# EAGLE board 14113-nrf52840-breakout-mdbt50q-Panel (EAGLE 9.1.0), part 1 of 4
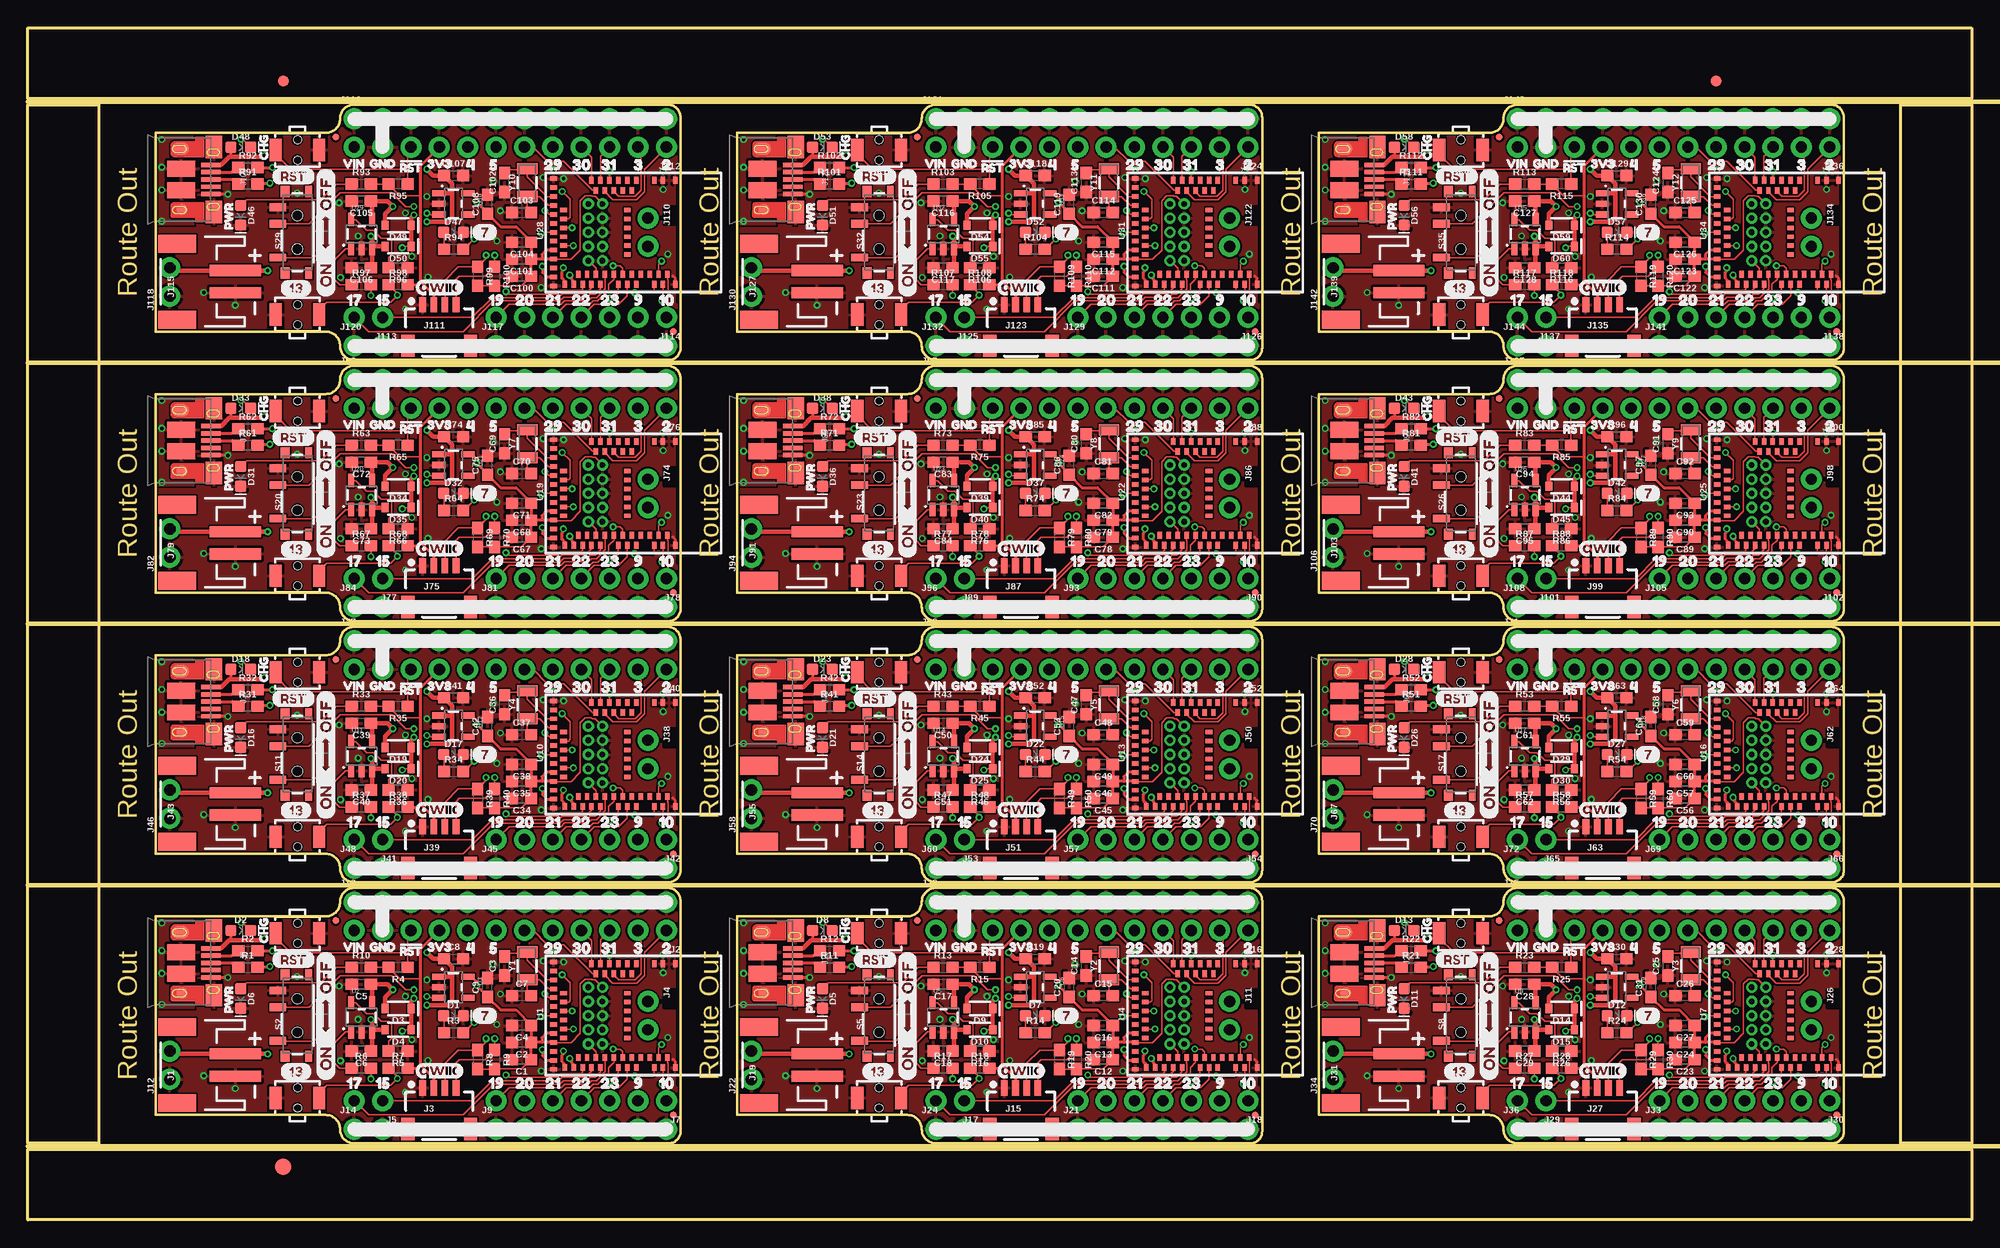
[diagram p0: board, top side]
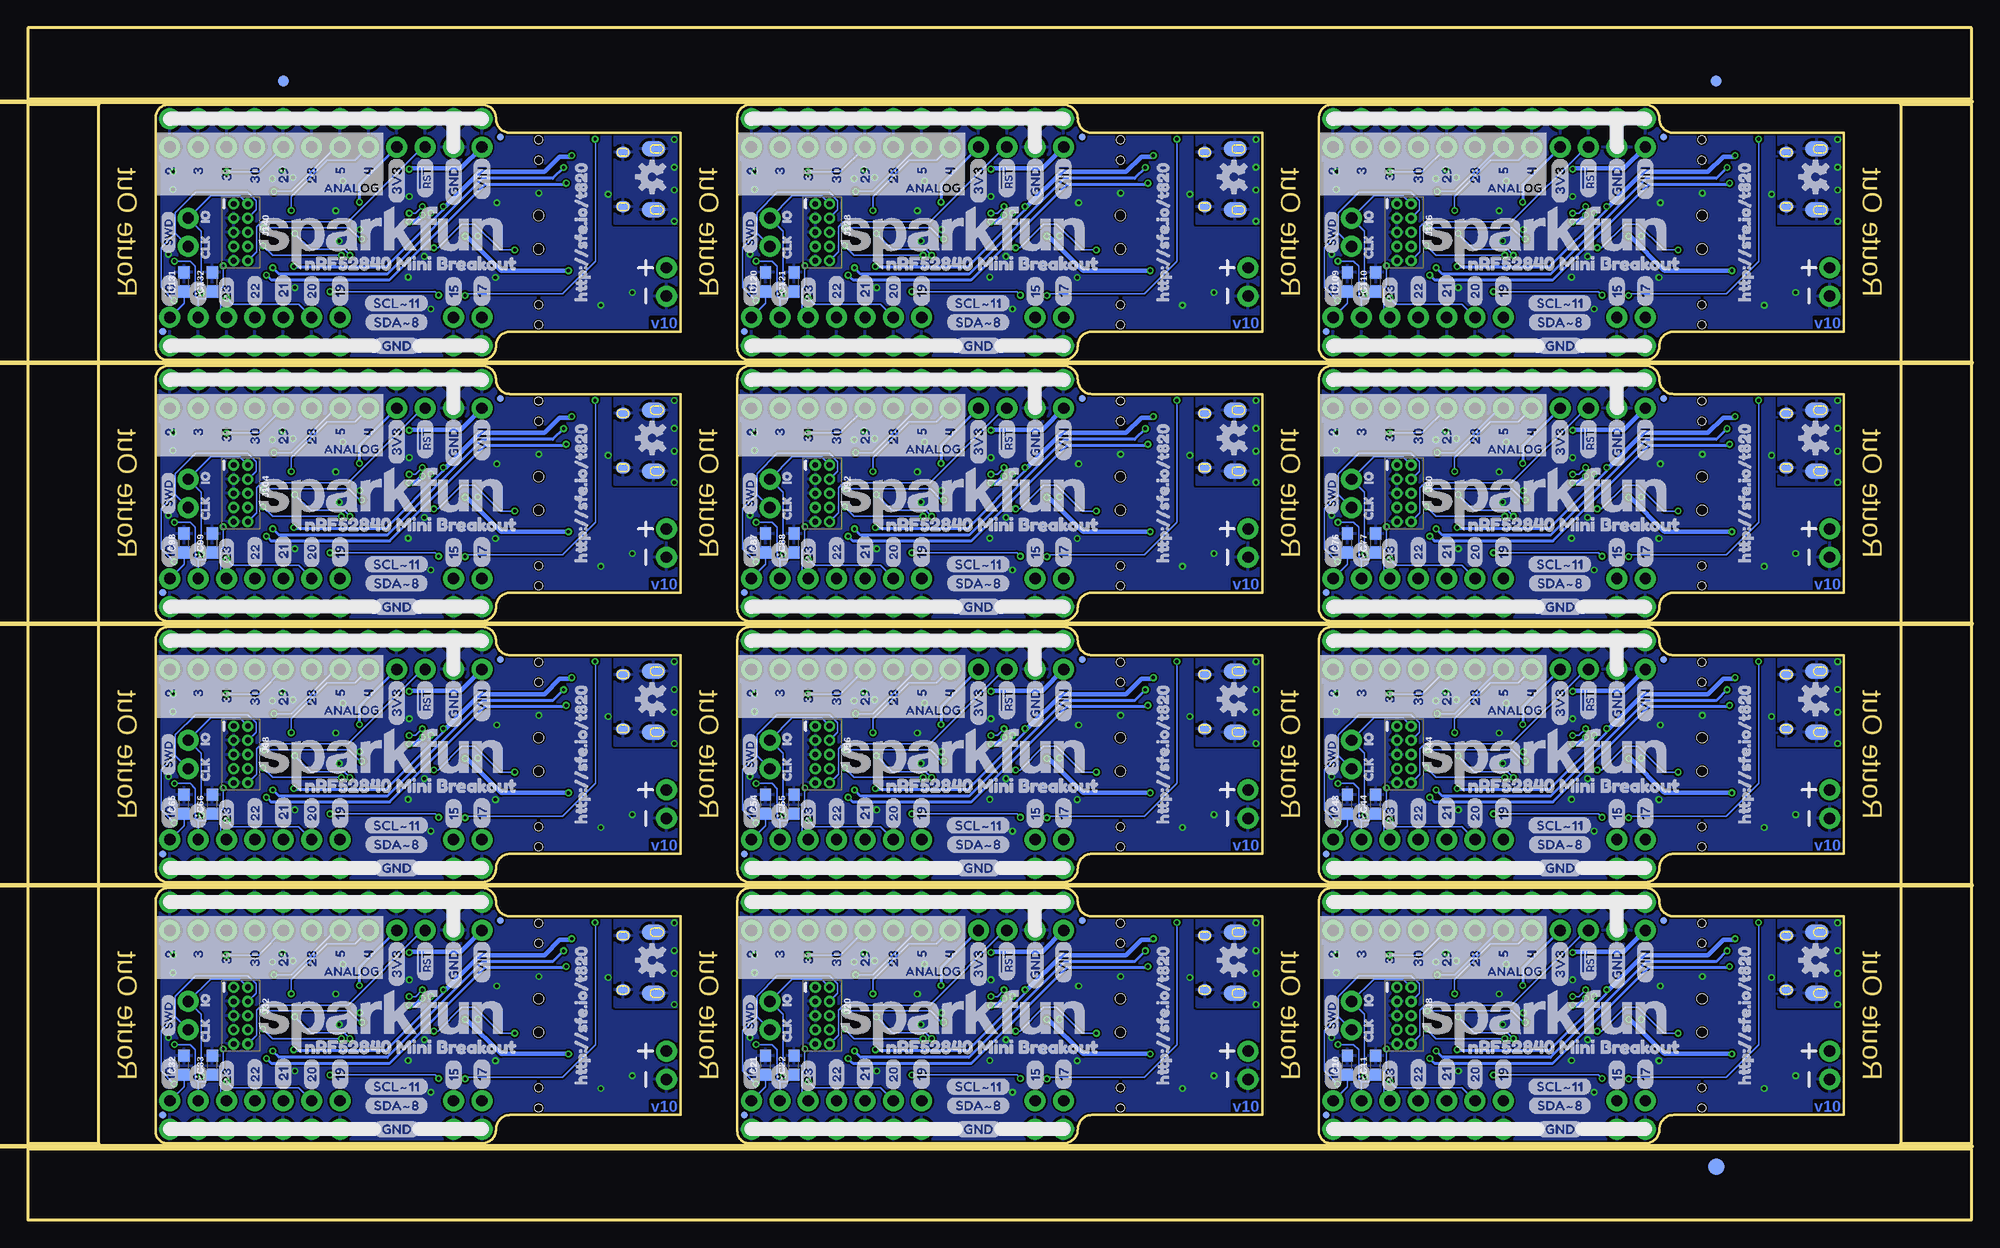
[diagram p1: board, bottom side, seen from below]

Size 173.99 x 106.68 mm. Coordinates in mm from the lower left corner, seen from the top.
Outline: 11.43,9.4 26.67,9.4 arc-90 27.94,8.13 arc90 29.21,6.86 57.34,6.86 arc90 58.42,7.93 58.42,28.55 arc90 57.26,29.72 29.21,29.72 arc90 27.94,28.45 arc-90 26.67,27.18 11.43,27.18 11.43,9.4
Outline: 63.5,9.4 78.74,9.4 arc-90 80.01,8.13 arc90 81.28,6.86 109.41,6.86 arc90 110.49,7.93 110.49,28.55 arc90 109.33,29.72 81.28,29.72 arc90 80.01,28.45 arc-90 78.74,27.18 63.5,27.18 63.5,9.4
Outline: 115.57,9.4 130.81,9.4 arc-90 132.08,8.13 arc90 133.35,6.86 161.49,6.86 arc90 162.56,7.93 162.56,28.55 arc90 161.4,29.72 133.35,29.72 arc90 132.08,28.45 arc-90 130.81,27.18 115.57,27.18 115.57,9.4
Outline: 11.43,32.77 26.67,32.77 arc-90 27.94,31.5 arc90 29.21,30.23 57.34,30.23 arc90 58.42,31.3 58.42,51.92 arc90 57.26,53.09 29.21,53.09 arc90 27.94,51.82 arc-90 26.67,50.55 11.43,50.55 11.43,32.77
Outline: 63.5,32.77 78.74,32.77 arc-90 80.01,31.5 arc90 81.28,30.23 109.41,30.23 arc90 110.49,31.3 110.49,51.92 arc90 109.33,53.09 81.28,53.09 arc90 80.01,51.82 arc-90 78.74,50.55 63.5,50.55 63.5,32.77
Outline: 115.57,32.77 130.81,32.77 arc-90 132.08,31.5 arc90 133.35,30.23 161.49,30.23 arc90 162.56,31.3 162.56,51.92 arc90 161.4,53.09 133.35,53.09 arc90 132.08,51.82 arc-90 130.81,50.55 115.57,50.55 115.57,32.77
Outline: 11.43,56.13 26.67,56.13 arc-90 27.94,54.86 arc90 29.21,53.59 57.34,53.59 arc90 58.42,54.67 58.42,75.29 arc90 57.26,76.45 29.21,76.45 arc90 27.94,75.18 arc-90 26.67,73.91 11.43,73.91 11.43,56.13
Outline: 63.5,56.13 78.74,56.13 arc-90 80.01,54.86 arc90 81.28,53.59 109.41,53.59 arc90 110.49,54.67 110.49,75.29 arc90 109.33,76.45 81.28,76.45 arc90 80.01,75.18 arc-90 78.74,73.91 63.5,73.91 63.5,56.13
Outline: 115.57,56.13 130.81,56.13 arc-90 132.08,54.86 arc90 133.35,53.59 161.49,53.59 arc90 162.56,54.67 162.56,75.29 arc90 161.4,76.45 133.35,76.45 arc90 132.08,75.18 arc-90 130.81,73.91 115.57,73.91 115.57,56.13
Outline: 11.43,79.5 26.67,79.5 arc-90 27.94,78.23 arc90 29.21,76.96 57.34,76.96 arc90 58.42,78.04 58.42,98.66 arc90 57.26,99.82 29.21,99.82 arc90 27.94,98.55 arc-90 26.67,97.28 11.43,97.28 11.43,79.5
Outline: 63.5,79.5 78.74,79.5 arc-90 80.01,78.23 arc90 81.28,76.96 109.41,76.96 arc90 110.49,78.04 110.49,98.66 arc90 109.33,99.82 81.28,99.82 arc90 80.01,98.55 arc-90 78.74,97.28 63.5,97.28 63.5,79.5
Outline: 115.57,79.5 130.81,79.5 arc-90 132.08,78.23 arc90 133.35,76.96 161.49,76.96 arc90 162.56,78.04 162.56,98.66 arc90 161.4,99.82 133.35,99.82 arc90 132.08,98.55 arc-90 130.81,97.28 115.57,97.28 115.57,79.5
Outline: 0,6.35 173.99,6.35 173.99,0 0,0 0,6.35
Outline: 167.64,99.82 173.99,99.82 173.99,6.86 167.64,6.86 167.64,99.82
Outline: 0,106.68 173.99,106.68 173.99,100.33 0,100.33 0,106.68
Outline: 0,99.82 6.35,99.82 6.35,6.86 0,6.86 0,99.82
Copper layers (1*16): Top 0.035mm / dielectric 1.5mm / Bottom 0.035mm
Design rules "SparkFun-2-layer-PCBWay-LIMIT": minimum track width 6mil, minimum drill 0.3mm, track to track 6mil, track to pad 6mil, pad to pad 6mil, via to via 6mil, smd to smd 6mil, copper to edge 6mil, drill to drill 6mil, minimum pad ring 6mil, minimum via ring 6mil, stop-mask expansion 4mil, vias tented up to drill 25mil, thermal gap 10mil
Net classes: 0 default: width 0 mm, drill 0 mm; 1 vcc: width 0 mm; 2 usb: width 0.254 mm, drill 0.305 mm, clearance 0.254 mm
Milling: 5 lines

## Footprints (pad centres in the part's own frame; a part is rotated, then mirrored left to right if it is on the bottom)
0603 = smd 1.1 x 1: 1 -0.85,0; 2 0.85,0
LED-0603 = smd 1 x 1: A -0.877,0; C 0.877,0
SOD-323 = smd 0.63 x 0.83: A 1.15,0; C -1.15,0
FIDUCIAL-1X2 = smd 1 x 1: 1 0,0
FIDUCIAL-1.5X3 = smd 1.5 x 1.5: 1 0,0
FIDUCIAL-MICRO = smd 0.635 x 0.635: 1 0,0
JST-2-SMD = smd 1 x 4.6: 1 -1,-3.7; 2 1,-3.7 | smd 1.6 x 3.4: NC1 -3.4,1.5; NC2 3.4,1.5
1X12_NO_SILK = drill 1.016 pad 1.88: 1 0,0; 2 2.54,0; 3 5.08,0; 4 7.62,0; 5 10.16,0; 6 12.7,0; 7 15.24,0; 8 17.78,0; 9 20.32,0; 10 22.86,0; 11 25.4,0; 12 27.94,0
1X04_1MM_RA = smd 0.6 x 1.35: 1 -1.5,0; 2 -0.5,0; 3 0.5,0; 4 1.5,0 | smd 1.2 x 2: NC1 2.8,-3.675; NC2 -2.8,-3.675
1X02_NO_SILK = drill 1.016 pad 1.88: 1 0,0; 2 2.54,0
USB-MICROB-PTH-MILL = smd 0.4 x 1.75: D+ 0,0; D- -0.65,0; GND 1.3,0; ID 0.65,0; VBUS -1.3,0 | smd 2 x 1.46: SHIELD -2.9,0.275; SHIELD2 2.9,0.275 | smd 1.425 x 2.5: SHIELD3 -0.963,-2.675; SHIELD4 0.963,-2.675 | smd 1.4 x 2.1 bottom: SHIELD5 -2.731,-2.531; SHIELD7 2.729,-2.531 | smd 1 x 1: SHIELD6 2.7,-2.575 | smd 1.1 x 1.5: SHIELD8 -2.731,-2.731 | smd 1 x 1.3 bottom: SHIELD9 -2.43,0.195; SHIELD10 2.43,0.195
1X07_NO_SILK = drill 1.016 pad 1.88: 1 0,0; 2 2.54,0; 3 5.08,0; 4 7.62,0; 5 10.16,0; 6 12.7,0; 7 15.24,0
2X5-PTH-1.27MM = drill 0.508 pad 1: 1 -2.54,-0.635; 2 -2.54,0.635; 3 -1.27,-0.635; 4 -1.27,0.635; 5 0,-0.635; 6 0,0.635; 7 1.27,-0.635; 8 1.27,0.635; 9 2.54,-0.635; 10 2.54,0.635
TACTILE_SWITCH_SMD_RIGHT_ANGLE = smd 1.1 x 2: 1 -1.95,0; 2 1.95,0 | hole 0.7: 0,0.9; 0,-0.9
SWITCH_SPST_SMD_A = smd 0.7 x 1.5: 1 -2.25,-1.75; 2 -0.75,-1.75; 3 2.25,-1.75 | smd 1 x 0.6: GND1 -3.65,1; GND3 3.65,1 | smd 1 x 0.8: GND2 -3.65,-1.1; GND4 3.65,-1.1 | hole 0.9: -1.5,0; 1.5,0
MDBT50Q = smd 0.6 x 0.4: 1 -4.65,3.65; 2 -4.65,2.55; 3 -4.65,1.75; 4 -4.65,0.15; 5 -3.75,-0.25; 6 -4.65,-0.65; 7 -3.75,-1.05; 8 -4.65,-1.45; 9 -3.75,-1.85; 10 -4.65,-2.25; 11 -3.75,-2.65; 12 -4.65,-3.05; 13 -3.75,-3.45; 14 -4.65,-3.85; 34 4.65,-6.25; 35 4.65,-5.45; 36 3.75,-5.05; 37 4.65,-4.65; 38 3.75,-4.25; 39 4.65,-3.85; 40 3.75,-3.45; 41 4.65,-3.05; 42 3.75,-2.65; 43 3.75,-1.85; 44 4.65,-1.45; 45 3.75,-1.05; 46 4.65,-0.65; 47 3.75,-0.25; 48 4.65,0.15; 49 3.75,0.55; 50 3.75,1.35; 51 4.65,1.75; 52 3.75,2.15; 53 4.65,2.55; 54 3.75,2.95; 55 4.65,3.65 | smd 0.4 x 0.6: 15 -4.8,-7.25; 16 -4,-7.25; 17 -3.2,-7.25; 18 -2.4,-7.25; 19 -2,-6.35; 20 -1.6,-7.25; 21 -1.2,-6.35; 22 -0.8,-7.25; 23 -0.4,-6.35; 24 0,-7.25; 25 0.4,-6.35; 26 0.8,-7.25; 27 1.2,-6.35; 28 1.6,-7.25; 29 2,-6.35; 30 2.4,-7.25; 31 3.2,-7.25; 32 4,-7.25; 33 4.8,-7.25; 56 -2,-0.65; 57 -1.2,-0.65; 58 -0.4,-0.65; 59 0.4,-0.65; 60 1.2,-0.65; 61 2,-0.65
SOT23-5 = smd 0.55 x 1.2: 1 -0.95,-1.3; 2 0,-1.3; 3 0.95,-1.3; 4 0.95,1.3; 5 -0.95,1.3
CRYSTAL-SMD-3.2X1.5MM = smd 1 x 1.8: P$1 -1.25,0; P$2 1.25,0

## Placement (x,y rotation side)
C1  10uF  [0603]  44.2,14.35 180 top
C2  0.1uF  [0603]  44.2,15.88 180 top
C3  15pF  [0603]  42.67,22.73 90 top
C4  10uF  [0603]  44.2,17.4 180 top
C5  4.7uF  [0603]  29.84,21.08 180 top
C6  4.7uF  [0603]  29.84,15.11 180 top
C7  15pF  [0603]  44.2,20.07 0 top
C8  1.0uF  [0603]  38.1,23.37 0 top
C9  1.0uF  [0603]  41.15,20.8 90 top
C10  DNP  [0603]  55.88,13.84 90 bottom
C11  DNP  [0603]  53.34,13.84 90 bottom
C12  10uF  [0603]  96.27,14.35 180 top
C13  0.1uF  [0603]  96.27,15.88 180 top
C14  15pF  [0603]  94.74,22.73 90 top
C15  15pF  [0603]  96.27,20.07 0 top
C16  10uF  [0603]  96.27,17.4 180 top
C17  4.7uF  [0603]  81.91,21.08 180 top
C18  4.7uF  [0603]  81.91,15.11 180 top
C19  1.0uF  [0603]  90.17,23.37 0 top
C20  1.0uF  [0603]  93.22,20.8 90 top
C21  DNP  [0603]  107.95,13.84 90 bottom
C22  DNP  [0603]  105.41,13.84 90 bottom
C23  10uF  [0603]  148.34,14.35 180 top
C24  0.1uF  [0603]  148.34,15.88 180 top
C25  15pF  [0603]  146.81,22.73 90 top
C26  15pF  [0603]  148.34,20.07 0 top
C27  10uF  [0603]  148.34,17.4 180 top
C28  4.7uF  [0603]  133.99,21.08 180 top
C29  4.7uF  [0603]  133.99,15.11 180 top
C30  1.0uF  [0603]  142.24,23.37 0 top
C31  1.0uF  [0603]  145.29,20.8 90 top
C32  DNP  [0603]  160.02,13.84 90 bottom
C33  DNP  [0603]  157.48,13.84 90 bottom
C34  10uF  [0603]  44.2,37.72 180 top
C35  0.1uF  [0603]  44.2,39.24 180 top
C36  15pF  [0603]  42.67,46.1 90 top
C37  15pF  [0603]  44.2,43.43 0 top
C38  10uF  [0603]  44.2,40.77 180 top
C39  4.7uF  [0603]  29.84,44.45 180 top
C40  4.7uF  [0603]  29.84,38.48 180 top
C41  1.0uF  [0603]  38.1,46.74 0 top
C42  1.0uF  [0603]  41.15,44.17 90 top
C43  DNP  [0603]  55.88,37.21 90 bottom
C44  DNP  [0603]  53.34,37.21 90 bottom
C45  10uF  [0603]  96.27,37.72 180 top
C46  0.1uF  [0603]  96.27,39.24 180 top
C47  15pF  [0603]  94.74,46.1 90 top
C48  15pF  [0603]  96.27,43.43 0 top
C49  10uF  [0603]  96.27,40.77 180 top
C50  4.7uF  [0603]  81.91,44.45 180 top
C51  4.7uF  [0603]  81.91,38.48 180 top
C52  1.0uF  [0603]  90.17,46.74 0 top
C53  1.0uF  [0603]  93.22,44.17 90 top
C54  DNP  [0603]  107.95,37.21 90 bottom
C55  DNP  [0603]  105.41,37.21 90 bottom
C56  10uF  [0603]  148.34,37.72 180 top
C57  0.1uF  [0603]  148.34,39.24 180 top
C58  15pF  [0603]  146.81,46.1 90 top
C59  15pF  [0603]  148.34,43.43 0 top
C60  10uF  [0603]  148.34,40.77 180 top
C61  4.7uF  [0603]  133.99,44.45 180 top
C62  4.7uF  [0603]  133.99,38.48 180 top
C63  1.0uF  [0603]  142.24,46.74 0 top
C64  1.0uF  [0603]  145.29,44.17 90 top
C65  DNP  [0603]  160.02,37.21 90 bottom
C66  DNP  [0603]  157.48,37.21 90 bottom
C67  10uF  [0603]  44.2,61.09 180 top
C68  0.1uF  [0603]  44.2,62.61 180 top
C69  15pF  [0603]  42.67,69.47 90 top
C70  15pF  [0603]  44.2,66.8 0 top
C71  10uF  [0603]  44.2,64.14 180 top
C72  4.7uF  [0603]  29.84,67.82 180 top
C73  4.7uF  [0603]  29.84,61.85 180 top
C74  1.0uF  [0603]  38.1,70.1 0 top
C75  1.0uF  [0603]  41.15,67.54 90 top
C76  DNP  [0603]  55.88,60.58 90 bottom
C77  DNP  [0603]  53.34,60.58 90 bottom
C78  10uF  [0603]  96.27,61.09 180 top
C79  0.1uF  [0603]  96.27,62.61 180 top
C80  15pF  [0603]  94.74,69.47 90 top
C81  15pF  [0603]  96.27,66.8 0 top
C82  10uF  [0603]  96.27,64.14 180 top
C83  4.7uF  [0603]  81.91,67.82 180 top
C84  4.7uF  [0603]  81.91,61.85 180 top
C85  1.0uF  [0603]  90.17,70.1 0 top
C86  1.0uF  [0603]  93.22,67.54 90 top
C87  DNP  [0603]  107.95,60.58 90 bottom
C88  DNP  [0603]  105.41,60.58 90 bottom
C89  10uF  [0603]  148.34,61.09 180 top
C90  0.1uF  [0603]  148.34,62.61 180 top
C91  15pF  [0603]  146.81,69.47 90 top
C92  15pF  [0603]  148.34,66.8 0 top
C93  10uF  [0603]  148.34,64.14 180 top
C94  4.7uF  [0603]  133.99,67.82 180 top
C95  4.7uF  [0603]  133.99,61.85 180 top
C96  1.0uF  [0603]  142.24,70.1 0 top
C97  1.0uF  [0603]  145.29,67.54 90 top
C98  DNP  [0603]  160.02,60.58 90 bottom
C99  DNP  [0603]  157.48,60.58 90 bottom
C100  10uF  [0603]  44.2,84.45 180 top
C101  0.1uF  [0603]  44.2,85.98 180 top
C102  15pF  [0603]  42.67,92.84 90 top
C103  15pF  [0603]  44.2,90.17 0 top
C104  10uF  [0603]  44.2,87.5 180 top
C105  4.7uF  [0603]  29.84,91.19 180 top
C106  4.7uF  [0603]  29.84,85.22 180 top
C107  1.0uF  [0603]  38.1,93.47 0 top
C108  1.0uF  [0603]  41.15,90.91 90 top
C109  DNP  [0603]  55.88,83.95 90 bottom
C110  DNP  [0603]  53.34,83.95 90 bottom
C111  10uF  [0603]  96.27,84.45 180 top
C112  0.1uF  [0603]  96.27,85.98 180 top
C113  15pF  [0603]  94.74,92.84 90 top
C114  15pF  [0603]  96.27,90.17 0 top
C115  10uF  [0603]  96.27,87.5 180 top
C116  4.7uF  [0603]  81.91,91.19 180 top
C117  4.7uF  [0603]  81.91,85.22 180 top
C118  1.0uF  [0603]  90.17,93.47 0 top
C119  1.0uF  [0603]  93.22,90.91 90 top
C120  DNP  [0603]  107.95,83.95 90 bottom
C121  DNP  [0603]  105.41,83.95 90 bottom
C122  10uF  [0603]  148.34,84.45 180 top
C123  0.1uF  [0603]  148.34,85.98 180 top
C124  15pF  [0603]  146.81,92.84 90 top
C125  15pF  [0603]  148.34,90.17 0 top
C126  10uF  [0603]  148.34,87.5 180 top
C127  4.7uF  [0603]  133.99,91.19 180 top
C128  4.7uF  [0603]  133.99,85.22 180 top
C129  1.0uF  [0603]  142.24,93.47 0 top
C130  1.0uF  [0603]  145.29,90.91 90 top
C131  DNP  [0603]  160.02,83.95 90 bottom
C132  DNP  [0603]  157.48,83.95 90 bottom
D1  BLUE  [LED-0603]  38.1,18.29 0 top
D2  Yellow  [LED-0603]  19.05,25.91 0 top
D3  1A/23V/620mV  [SOD-323]  33.15,18.92 180 top
D4  1A/23V/620mV  [SOD-323]  33.15,17.02 180 top
D5  RED  [LED-0603]  71.12,19.81 270 top
D6  RED  [LED-0603]  19.05,19.81 270 top
D7  BLUE  [LED-0603]  90.17,18.29 0 top
D8  Yellow  [LED-0603]  71.12,25.91 0 top
D9  1A/23V/620mV  [SOD-323]  85.22,18.92 180 top
D10  1A/23V/620mV  [SOD-323]  85.22,17.02 180 top
D11  RED  [LED-0603]  123.19,19.81 270 top
D12  BLUE  [LED-0603]  142.24,18.29 0 top
D13  Yellow  [LED-0603]  123.19,25.91 0 top
D14  1A/23V/620mV  [SOD-323]  137.29,18.92 180 top
D15  1A/23V/620mV  [SOD-323]  137.29,17.02 180 top
D16  RED  [LED-0603]  19.05,43.18 270 top
D17  BLUE  [LED-0603]  38.1,41.66 0 top
D18  Yellow  [LED-0603]  19.05,49.28 0 top
D19  1A/23V/620mV  [SOD-323]  33.15,42.29 180 top
D20  1A/23V/620mV  [SOD-323]  33.15,40.39 180 top
D21  RED  [LED-0603]  71.12,43.18 270 top
D22  BLUE  [LED-0603]  90.17,41.66 0 top
D23  Yellow  [LED-0603]  71.12,49.28 0 top
D24  1A/23V/620mV  [SOD-323]  85.22,42.29 180 top
D25  1A/23V/620mV  [SOD-323]  85.22,40.39 180 top
D26  RED  [LED-0603]  123.19,43.18 270 top
D27  BLUE  [LED-0603]  142.24,41.66 0 top
D28  Yellow  [LED-0603]  123.19,49.28 0 top
D29  1A/23V/620mV  [SOD-323]  137.29,42.29 180 top
D30  1A/23V/620mV  [SOD-323]  137.29,40.39 180 top
D31  RED  [LED-0603]  19.05,66.55 270 top
D32  BLUE  [LED-0603]  38.1,65.02 0 top
D33  Yellow  [LED-0603]  19.05,72.64 0 top
D34  1A/23V/620mV  [SOD-323]  33.15,65.66 180 top
D35  1A/23V/620mV  [SOD-323]  33.15,63.75 180 top
D36  RED  [LED-0603]  71.12,66.55 270 top
D37  BLUE  [LED-0603]  90.17,65.02 0 top
D38  Yellow  [LED-0603]  71.12,72.64 0 top
D39  1A/23V/620mV  [SOD-323]  85.22,65.66 180 top
D40  1A/23V/620mV  [SOD-323]  85.22,63.75 180 top
D41  RED  [LED-0603]  123.19,66.55 270 top
D42  BLUE  [LED-0603]  142.24,65.02 0 top
D43  Yellow  [LED-0603]  123.19,72.64 0 top
D44  1A/23V/620mV  [SOD-323]  137.29,65.66 180 top
D45  1A/23V/620mV  [SOD-323]  137.29,63.75 180 top
D46  RED  [LED-0603]  19.05,89.92 270 top
D47  BLUE  [LED-0603]  38.1,88.39 0 top
D48  Yellow  [LED-0603]  19.05,96.01 0 top
D49  1A/23V/620mV  [SOD-323]  33.15,89.03 180 top
D50  1A/23V/620mV  [SOD-323]  33.15,87.12 180 top
D51  RED  [LED-0603]  71.12,89.92 270 top
D52  BLUE  [LED-0603]  90.17,88.39 0 top
D53  Yellow  [LED-0603]  71.12,96.01 0 top
D54  1A/23V/620mV  [SOD-323]  85.22,89.03 180 top
D55  1A/23V/620mV  [SOD-323]  85.22,87.12 180 top
D56  RED  [LED-0603]  123.19,89.92 270 top
D57  BLUE  [LED-0603]  142.24,88.39 0 top
D58  Yellow  [LED-0603]  123.19,96.01 0 top
D59  1A/23V/620mV  [SOD-323]  137.29,89.03 180 top
D60  1A/23V/620mV  [SOD-323]  137.29,87.12 180 top
E$1  [FIDUCIAL-1X2]  22.86,101.92 0 top
E$2  [FIDUCIAL-1X2]  22.86,101.92 0 bottom
E$3  [FIDUCIAL-1X2]  151.13,101.92 0 top
E$4  [FIDUCIAL-1X2]  151.13,101.92 0 bottom
E$5  [FIDUCIAL-1.5X3]  22.86,4.76 0 top
E$6  [FIDUCIAL-1.5X3]  22.86,4.76 0 bottom
FD1  FIDUCIALUFIDUCIAL  [FIDUCIAL-MICRO]  27.56,26.8 0 top
FD2  FIDUCIALUFIDUCIAL  [FIDUCIAL-MICRO]  57.78,9.4 0 top
FD3  FIDUCIALUFIDUCIAL  [FIDUCIAL-MICRO]  57.78,9.4 0 bottom
FD4  FIDUCIALUFIDUCIAL  [FIDUCIAL-MICRO]  27.56,26.8 0 bottom
FD5  FIDUCIALUFIDUCIAL  [FIDUCIAL-MICRO]  79.63,26.8 0 top
FD6  FIDUCIALUFIDUCIAL  [FIDUCIAL-MICRO]  109.85,9.4 0 top
FD7  FIDUCIALUFIDUCIAL  [FIDUCIAL-MICRO]  109.85,9.4 0 bottom
FD8  FIDUCIALUFIDUCIAL  [FIDUCIAL-MICRO]  79.63,26.8 0 bottom
FD9  FIDUCIALUFIDUCIAL  [FIDUCIAL-MICRO]  131.7,26.8 0 top
FD10  FIDUCIALUFIDUCIAL  [FIDUCIAL-MICRO]  161.93,9.4 0 top
FD11  FIDUCIALUFIDUCIAL  [FIDUCIAL-MICRO]  161.93,9.4 0 bottom
FD12  FIDUCIALUFIDUCIAL  [FIDUCIAL-MICRO]  131.7,26.8 0 bottom
FD13  FIDUCIALUFIDUCIAL  [FIDUCIAL-MICRO]  27.56,50.16 0 top
FD14  FIDUCIALUFIDUCIAL  [FIDUCIAL-MICRO]  57.78,32.77 0 top
FD15  FIDUCIALUFIDUCIAL  [FIDUCIAL-MICRO]  57.78,32.77 0 bottom
FD16  FIDUCIALUFIDUCIAL  [FIDUCIAL-MICRO]  27.56,50.16 0 bottom
FD17  FIDUCIALUFIDUCIAL  [FIDUCIAL-MICRO]  79.63,50.16 0 top
FD18  FIDUCIALUFIDUCIAL  [FIDUCIAL-MICRO]  109.85,32.77 0 top
FD19  FIDUCIALUFIDUCIAL  [FIDUCIAL-MICRO]  109.85,32.77 0 bottom
FD20  FIDUCIALUFIDUCIAL  [FIDUCIAL-MICRO]  79.63,50.16 0 bottom
FD21  FIDUCIALUFIDUCIAL  [FIDUCIAL-MICRO]  131.7,50.16 0 top
FD22  FIDUCIALUFIDUCIAL  [FIDUCIAL-MICRO]  161.93,32.77 0 top
FD23  FIDUCIALUFIDUCIAL  [FIDUCIAL-MICRO]  161.93,32.77 0 bottom
FD24  FIDUCIALUFIDUCIAL  [FIDUCIAL-MICRO]  131.7,50.16 0 bottom
FD25  FIDUCIALUFIDUCIAL  [FIDUCIAL-MICRO]  27.56,73.53 0 top
FD26  FIDUCIALUFIDUCIAL  [FIDUCIAL-MICRO]  57.78,56.13 0 top
FD27  FIDUCIALUFIDUCIAL  [FIDUCIAL-MICRO]  57.78,56.13 0 bottom
FD28  FIDUCIALUFIDUCIAL  [FIDUCIAL-MICRO]  27.56,73.53 0 bottom
FD29  FIDUCIALUFIDUCIAL  [FIDUCIAL-MICRO]  79.63,73.53 0 top
FD30  FIDUCIALUFIDUCIAL  [FIDUCIAL-MICRO]  109.85,56.13 0 top
FD31  FIDUCIALUFIDUCIAL  [FIDUCIAL-MICRO]  109.85,56.13 0 bottom
FD32  FIDUCIALUFIDUCIAL  [FIDUCIAL-MICRO]  79.63,73.53 0 bottom
FD33  FIDUCIALUFIDUCIAL  [FIDUCIAL-MICRO]  131.7,73.53 0 top
FD34  FIDUCIALUFIDUCIAL  [FIDUCIAL-MICRO]  161.93,56.13 0 top
FD35  FIDUCIALUFIDUCIAL  [FIDUCIAL-MICRO]  161.93,56.13 0 bottom
FD36  FIDUCIALUFIDUCIAL  [FIDUCIAL-MICRO]  131.7,73.53 0 bottom
FD37  FIDUCIALUFIDUCIAL  [FIDUCIAL-MICRO]  27.56,96.9 0 top
FD38  FIDUCIALUFIDUCIAL  [FIDUCIAL-MICRO]  57.78,79.5 0 top
FD39  FIDUCIALUFIDUCIAL  [FIDUCIAL-MICRO]  57.78,79.5 0 bottom
FD40  FIDUCIALUFIDUCIAL  [FIDUCIAL-MICRO]  27.56,96.9 0 bottom
FD41  FIDUCIALUFIDUCIAL  [FIDUCIAL-MICRO]  79.63,96.9 0 top
FD42  FIDUCIALUFIDUCIAL  [FIDUCIAL-MICRO]  109.85,79.5 0 top
FD43  FIDUCIALUFIDUCIAL  [FIDUCIAL-MICRO]  109.85,79.5 0 bottom
FD44  FIDUCIALUFIDUCIAL  [FIDUCIAL-MICRO]  79.63,96.9 0 bottom
FD45  FIDUCIALUFIDUCIAL  [FIDUCIAL-MICRO]  131.7,96.9 0 top
FD46  FIDUCIALUFIDUCIAL  [FIDUCIAL-MICRO]  161.93,79.5 0 top
FD47  FIDUCIALUFIDUCIAL  [FIDUCIAL-MICRO]  161.93,79.5 0 bottom
FD48  FIDUCIALUFIDUCIAL  [FIDUCIAL-MICRO]  131.7,96.9 0 bottom
J1  [JST-2-SMD]  14.88,13.87 90 top
J2  [1X12_NO_SILK]  57.15,25.91 180 top
J3  [1X04_1MM_RA]  36.83,11.81 0 top
J4  [1X02_NO_SILK]  55.5,19.56 270 top
J5  [1X02_NO_SILK]  31.75,10.67 180 top
J6  [USB-MICROB-PTH-MILL]  16.38,23.01 270 top
J7  [1X07_NO_SILK]  57.15,10.67 180 top
J8  CORTEX_DEBUG_PTH  [2X5-PTH-1.27MM]  50.8,18.29 270 bottom
J9  [1X07_NO_SILK]  41.91,8.13 0 top
J10  [USB-MICROB-PTH-MILL]  68.45,23.01 270 top
J11  [1X02_NO_SILK]  107.57,19.56 270 top
J12  [1X02_NO_SILK]  12.7,12.57 90 top
J13  [1X12_NO_SILK]  29.21,28.45 0 top
J14  [1X02_NO_SILK]  29.21,8.13 0 top
J15  [1X04_1MM_RA]  88.9,11.81 0 top
J16  [1X12_NO_SILK]  109.22,25.91 180 top
J17  [1X02_NO_SILK]  83.82,10.67 180 top
J18  [1X07_NO_SILK]  109.22,10.67 180 top
J19  [JST-2-SMD]  66.95,13.87 90 top
J20  CORTEX_DEBUG_PTH  [2X5-PTH-1.27MM]  102.87,18.29 270 bottom
J21  [1X07_NO_SILK]  93.98,8.13 0 top
J22  [1X02_NO_SILK]  64.77,12.57 90 top
J23  [1X12_NO_SILK]  81.28,28.45 0 top
J24  [1X02_NO_SILK]  81.28,8.13 0 top
J25  [USB-MICROB-PTH-MILL]  120.52,23.01 270 top
J26  [1X02_NO_SILK]  159.64,19.56 270 top
J27  [1X04_1MM_RA]  140.97,11.81 0 top
J28  [1X12_NO_SILK]  161.29,25.91 180 top
J29  [1X02_NO_SILK]  135.89,10.67 180 top
J30  [1X07_NO_SILK]  161.29,10.67 180 top
J31  [JST-2-SMD]  119.02,13.87 90 top
J32  CORTEX_DEBUG_PTH  [2X5-PTH-1.27MM]  154.94,18.29 270 bottom
J33  [1X07_NO_SILK]  146.05,8.13 0 top
J34  [1X02_NO_SILK]  116.84,12.57 90 top
J35  [1X12_NO_SILK]  133.35,28.45 0 top
J36  [1X02_NO_SILK]  133.35,8.13 0 top
J37  [USB-MICROB-PTH-MILL]  16.38,46.38 270 top
J38  [1X02_NO_SILK]  55.5,42.93 270 top
J39  [1X04_1MM_RA]  36.83,35.18 0 top
J40  [1X12_NO_SILK]  57.15,49.28 180 top
J41  [1X02_NO_SILK]  31.75,34.04 180 top
J42  [1X07_NO_SILK]  57.15,34.04 180 top
J43  [JST-2-SMD]  14.88,37.24 90 top
J44  CORTEX_DEBUG_PTH  [2X5-PTH-1.27MM]  50.8,41.66 270 bottom
J45  [1X07_NO_SILK]  41.91,31.5 0 top
J46  [1X02_NO_SILK]  12.7,35.94 90 top
J47  [1X12_NO_SILK]  29.21,51.82 0 top
J48  [1X02_NO_SILK]  29.21,31.5 0 top
J49  [USB-MICROB-PTH-MILL]  68.45,46.38 270 top
J50  [1X02_NO_SILK]  107.57,42.93 270 top
J51  [1X04_1MM_RA]  88.9,35.18 0 top
J52  [1X12_NO_SILK]  109.22,49.28 180 top
J53  [1X02_NO_SILK]  83.82,34.04 180 top
J54  [1X07_NO_SILK]  109.22,34.04 180 top
J55  [JST-2-SMD]  66.95,37.24 90 top
J56  CORTEX_DEBUG_PTH  [2X5-PTH-1.27MM]  102.87,41.66 270 bottom
J57  [1X07_NO_SILK]  93.98,31.5 0 top
J58  [1X02_NO_SILK]  64.77,35.94 90 top
J59  [1X12_NO_SILK]  81.28,51.82 0 top
J60  [1X02_NO_SILK]  81.28,31.5 0 top
J61  [USB-MICROB-PTH-MILL]  120.52,46.38 270 top
J62  [1X02_NO_SILK]  159.64,42.93 270 top
J63  [1X04_1MM_RA]  140.97,35.18 0 top
J64  [1X12_NO_SILK]  161.29,49.28 180 top
J65  [1X02_NO_SILK]  135.89,34.04 180 top
J66  [1X07_NO_SILK]  161.29,34.04 180 top
J67  [JST-2-SMD]  119.02,37.24 90 top
J68  CORTEX_DEBUG_PTH  [2X5-PTH-1.27MM]  154.94,41.66 270 bottom
J69  [1X07_NO_SILK]  146.05,31.5 0 top
J70  [1X02_NO_SILK]  116.84,35.94 90 top
J71  [1X12_NO_SILK]  133.35,51.82 0 top
J72  [1X02_NO_SILK]  133.35,31.5 0 top
J73  [USB-MICROB-PTH-MILL]  16.38,69.75 270 top
J74  [1X02_NO_SILK]  55.5,66.29 270 top
J75  [1X04_1MM_RA]  36.83,58.55 0 top
J76  [1X12_NO_SILK]  57.15,72.64 180 top
J77  [1X02_NO_SILK]  31.75,57.4 180 top
J78  [1X07_NO_SILK]  57.15,57.4 180 top
J79  [JST-2-SMD]  14.88,60.6 90 top
J80  CORTEX_DEBUG_PTH  [2X5-PTH-1.27MM]  50.8,65.02 270 bottom
J81  [1X07_NO_SILK]  41.91,54.86 0 top
J82  [1X02_NO_SILK]  12.7,59.31 90 top
J83  [1X12_NO_SILK]  29.21,75.18 0 top
J84  [1X02_NO_SILK]  29.21,54.86 0 top
J85  [USB-MICROB-PTH-MILL]  68.45,69.75 270 top
J86  [1X02_NO_SILK]  107.57,66.29 270 top
J87  [1X04_1MM_RA]  88.9,58.55 0 top
J88  [1X12_NO_SILK]  109.22,72.64 180 top
J89  [1X02_NO_SILK]  83.82,57.4 180 top
J90  [1X07_NO_SILK]  109.22,57.4 180 top
J91  [JST-2-SMD]  66.95,60.6 90 top
J92  CORTEX_DEBUG_PTH  [2X5-PTH-1.27MM]  102.87,65.02 270 bottom
J93  [1X07_NO_SILK]  93.98,54.86 0 top
J94  [1X02_NO_SILK]  64.77,59.31 90 top
J95  [1X12_NO_SILK]  81.28,75.18 0 top
J96  [1X02_NO_SILK]  81.28,54.86 0 top
J97  [USB-MICROB-PTH-MILL]  120.52,69.75 270 top
J98  [1X02_NO_SILK]  159.64,66.29 270 top
J99  [1X04_1MM_RA]  140.97,58.55 0 top
J100  [1X12_NO_SILK]  161.29,72.64 180 top
J101  [1X02_NO_SILK]  135.89,57.4 180 top
J102  [1X07_NO_SILK]  161.29,57.4 180 top
J103  [JST-2-SMD]  119.02,60.6 90 top
J104  CORTEX_DEBUG_PTH  [2X5-PTH-1.27MM]  154.94,65.02 270 bottom
J105  [1X07_NO_SILK]  146.05,54.86 0 top
J106  [1X02_NO_SILK]  116.84,59.31 90 top
J107  [1X12_NO_SILK]  133.35,75.18 0 top
J108  [1X02_NO_SILK]  133.35,54.86 0 top
J109  [USB-MICROB-PTH-MILL]  16.38,93.12 270 top
J110  [1X02_NO_SILK]  55.5,89.66 270 top
J111  [1X04_1MM_RA]  36.83,81.92 0 top
J112  [1X12_NO_SILK]  57.15,96.01 180 top
J113  [1X02_NO_SILK]  31.75,80.77 180 top
J114  [1X07_NO_SILK]  57.15,80.77 180 top
J115  [JST-2-SMD]  14.88,83.97 90 top
J116  CORTEX_DEBUG_PTH  [2X5-PTH-1.27MM]  50.8,88.39 270 bottom
J117  [1X07_NO_SILK]  41.91,78.23 0 top
J118  [1X02_NO_SILK]  12.7,82.68 90 top
J119  [1X12_NO_SILK]  29.21,98.55 0 top
J120  [1X02_NO_SILK]  29.21,78.23 0 top
J121  [USB-MICROB-PTH-MILL]  68.45,93.12 270 top
J122  [1X02_NO_SILK]  107.57,89.66 270 top
J123  [1X04_1MM_RA]  88.9,81.92 0 top
J124  [1X12_NO_SILK]  109.22,96.01 180 top
J125  [1X02_NO_SILK]  83.82,80.77 180 top
J126  [1X07_NO_SILK]  109.22,80.77 180 top
J127  [JST-2-SMD]  66.95,83.97 90 top
J128  CORTEX_DEBUG_PTH  [2X5-PTH-1.27MM]  102.87,88.39 270 bottom
J129  [1X07_NO_SILK]  93.98,78.23 0 top
J130  [1X02_NO_SILK]  64.77,82.68 90 top
J131  [1X12_NO_SILK]  81.28,98.55 0 top
J132  [1X02_NO_SILK]  81.28,78.23 0 top
J133  [USB-MICROB-PTH-MILL]  120.52,93.12 270 top
J134  [1X02_NO_SILK]  159.64,89.66 270 top
J135  [1X04_1MM_RA]  140.97,81.92 0 top
J136  [1X12_NO_SILK]  161.29,96.01 180 top
J137  [1X02_NO_SILK]  135.89,80.77 180 top
J138  [1X07_NO_SILK]  161.29,80.77 180 top
J139  [JST-2-SMD]  119.02,83.97 90 top
J140  CORTEX_DEBUG_PTH  [2X5-PTH-1.27MM]  154.94,88.39 270 bottom
J141  [1X07_NO_SILK]  146.05,78.23 0 top
J142  [1X02_NO_SILK]  116.84,82.68 90 top
J143  [1X12_NO_SILK]  133.35,98.55 0 top
J144  [1X02_NO_SILK]  133.35,78.23 0 top
LOGO1  SFE_LOGO_NAME.2_INCH  [SFE_LOGO_NAME_.2]  49.15,14.99 0 bottom
LOGO2  OSHW-LOGOS  [OSHW-LOGO-S]  13.97,23.24 90 bottom
LOGO3  SFE_LOGO_NAME.2_INCH  [SFE_LOGO_NAME_.2]  101.22,14.99 0 bottom
LOGO4  OSHW-LOGOS  [OSHW-LOGO-S]  66.04,23.24 90 bottom
LOGO5  SFE_LOGO_NAME.2_INCH  [SFE_LOGO_NAME_.2]  153.29,14.99 0 bottom
LOGO6  OSHW-LOGOS  [OSHW-LOGO-S]  118.11,23.24 90 bottom
LOGO7  SFE_LOGO_NAME.2_INCH  [SFE_LOGO_NAME_.2]  49.15,38.35 0 bottom
LOGO8  OSHW-LOGOS  [OSHW-LOGO-S]  13.97,46.61 90 bottom
LOGO9  SFE_LOGO_NAME.2_INCH  [SFE_LOGO_NAME_.2]  101.22,38.35 0 bottom
LOGO10  OSHW-LOGOS  [OSHW-LOGO-S]  66.04,46.61 90 bottom
LOGO11  SFE_LOGO_NAME.2_INCH  [SFE_LOGO_NAME_.2]  153.29,38.35 0 bottom
LOGO12  OSHW-LOGOS  [OSHW-LOGO-S]  118.11,46.61 90 bottom
LOGO13  SFE_LOGO_NAME.2_INCH  [SFE_LOGO_NAME_.2]  49.15,61.72 0 bottom
LOGO14  OSHW-LOGOS  [OSHW-LOGO-S]  13.97,69.98 90 bottom
LOGO15  SFE_LOGO_NAME.2_INCH  [SFE_LOGO_NAME_.2]  101.22,61.72 0 bottom
LOGO16  OSHW-LOGOS  [OSHW-LOGO-S]  66.04,69.98 90 bottom
LOGO17  SFE_LOGO_NAME.2_INCH  [SFE_LOGO_NAME_.2]  153.29,61.72 0 bottom
LOGO18  OSHW-LOGOS  [OSHW-LOGO-S]  118.11,69.98 90 bottom
LOGO19  SFE_LOGO_NAME.2_INCH  [SFE_LOGO_NAME_.2]  49.15,85.09 0 bottom
LOGO20  OSHW-LOGOS  [OSHW-LOGO-S]  13.97,93.34 90 bottom
LOGO21  SFE_LOGO_NAME.2_INCH  [SFE_LOGO_NAME_.2]  101.22,85.09 0 bottom
LOGO22  OSHW-LOGOS  [OSHW-LOGO-S]  66.04,93.34 90 bottom
LOGO23  SFE_LOGO_NAME.2_INCH  [SFE_LOGO_NAME_.2]  153.29,85.09 0 bottom
LOGO24  OSHW-LOGOS  [OSHW-LOGO-S]  118.11,93.34 90 bottom
R1  27  [0603]  19.69,22.61 0 top
R2  27  [0603]  19.69,24.08 0 top
R3  1k  [0603]  38.1,16.76 0 top
R4  10k  [0603]  33.15,22.61 180 top
R5  2.0k  [0603]  33.15,15.11 180 top
R6  1k  [0603]  29.84,13.59 0 top
R7  10k  [0603]  33.15,13.59 0 top
R8  2.2k  [0603]  40.26,14.35 270 top
R9  2.2k  [0603]  41.78,14.35 270 top
R10  1k  [0603]  29.84,22.61 0 top
R11  27  [0603]  71.75,22.61 0 top
R12  27  [0603]  71.75,24.08 0 top
R13  1k  [0603]  81.91,22.61 0 top
R14  1k  [0603]  90.17,16.76 0 top
R15  10k  [0603]  85.22,22.61 180 top
R16  2.0k  [0603]  85.22,15.11 180 top
R17  1k  [0603]  81.91,13.59 0 top
R18  10k  [0603]  85.22,13.59 0 top
R19  2.2k  [0603]  92.33,14.35 270 top
R20  2.2k  [0603]  93.85,14.35 270 top
R21  27  [0603]  123.82,22.61 0 top
R22  27  [0603]  123.82,24.08 0 top
R23  1k  [0603]  133.99,22.61 0 top
R24  1k  [0603]  142.24,16.76 0 top
R25  10k  [0603]  137.29,22.61 180 top
R26  2.0k  [0603]  137.29,15.11 180 top
R27  1k  [0603]  133.99,13.59 0 top
R28  10k  [0603]  137.29,13.59 0 top
R29  2.2k  [0603]  144.4,14.35 270 top
R30  2.2k  [0603]  145.92,14.35 270 top
R31  27  [0603]  19.69,45.97 0 top
R32  27  [0603]  19.69,47.45 0 top
R33  1k  [0603]  29.84,45.97 0 top
R34  1k  [0603]  38.1,40.13 0 top
R35  10k  [0603]  33.15,45.97 180 top
R36  2.0k  [0603]  33.15,38.48 180 top
R37  1k  [0603]  29.84,36.96 0 top
R38  10k  [0603]  33.15,36.96 0 top
R39  2.2k  [0603]  40.26,37.72 270 top
R40  2.2k  [0603]  41.78,37.72 270 top
R41  27  [0603]  71.75,45.97 0 top
R42  27  [0603]  71.75,47.45 0 top
R43  1k  [0603]  81.91,45.97 0 top
R44  1k  [0603]  90.17,40.13 0 top
R45  10k  [0603]  85.22,45.97 180 top
R46  2.0k  [0603]  85.22,38.48 180 top
R47  1k  [0603]  81.91,36.96 0 top
R48  10k  [0603]  85.22,36.96 0 top
R49  2.2k  [0603]  92.33,37.72 270 top
R50  2.2k  [0603]  93.85,37.72 270 top
R51  27  [0603]  123.82,45.97 0 top
R52  27  [0603]  123.82,47.45 0 top
R53  1k  [0603]  133.99,45.97 0 top
R54  1k  [0603]  142.24,40.13 0 top
R55  10k  [0603]  137.29,45.97 180 top
R56  2.0k  [0603]  137.29,38.48 180 top
R57  1k  [0603]  133.99,36.96 0 top
R58  10k  [0603]  137.29,36.96 0 top
R59  2.2k  [0603]  144.4,37.72 270 top
R60  2.2k  [0603]  145.92,37.72 270 top
R61  27  [0603]  19.69,69.34 0 top
R62  27  [0603]  19.69,70.82 0 top
R63  1k  [0603]  29.84,69.34 0 top
R64  1k  [0603]  38.1,63.5 0 top
R65  10k  [0603]  33.15,69.34 180 top
R66  2.0k  [0603]  33.15,61.85 180 top
R67  1k  [0603]  29.84,60.32 0 top
R68  10k  [0603]  33.15,60.32 0 top
R69  2.2k  [0603]  40.26,61.09 270 top
R70  2.2k  [0603]  41.78,61.09 270 top
R71  27  [0603]  71.75,69.34 0 top
R72  27  [0603]  71.75,70.82 0 top
R73  1k  [0603]  81.91,69.34 0 top
R74  1k  [0603]  90.17,63.5 0 top
R75  10k  [0603]  85.22,69.34 180 top
R76  2.0k  [0603]  85.22,61.85 180 top
R77  1k  [0603]  81.91,60.32 0 top
R78  10k  [0603]  85.22,60.32 0 top
R79  2.2k  [0603]  92.33,61.09 270 top
R80  2.2k  [0603]  93.85,61.09 270 top
R81  27  [0603]  123.82,69.34 0 top
R82  27  [0603]  123.82,70.82 0 top
R83  1k  [0603]  133.99,69.34 0 top
R84  1k  [0603]  142.24,63.5 0 top
R85  10k  [0603]  137.29,69.34 180 top
R86  2.0k  [0603]  137.29,61.85 180 top
R87  1k  [0603]  133.99,60.32 0 top
R88  10k  [0603]  137.29,60.32 0 top
R89  2.2k  [0603]  144.4,61.09 270 top
R90  2.2k  [0603]  145.92,61.09 270 top
R91  27  [0603]  19.69,92.71 0 top
R92  27  [0603]  19.69,94.18 0 top
R93  1k  [0603]  29.84,92.71 0 top
R94  1k  [0603]  38.1,86.87 0 top
R95  10k  [0603]  33.15,92.71 180 top
R96  2.0k  [0603]  33.15,85.22 180 top
R97  1k  [0603]  29.84,83.69 0 top
R98  10k  [0603]  33.15,83.69 0 top
R99  2.2k  [0603]  40.26,84.45 270 top
R100  2.2k  [0603]  41.78,84.45 270 top
R101  27  [0603]  71.75,92.71 0 top
R102  27  [0603]  71.75,94.18 0 top
R103  1k  [0603]  81.91,92.71 0 top
R104  1k  [0603]  90.17,86.87 0 top
R105  10k  [0603]  85.22,92.71 180 top
R106  2.0k  [0603]  85.22,85.22 180 top
R107  1k  [0603]  81.91,83.69 0 top
R108  10k  [0603]  85.22,83.69 0 top
R109  2.2k  [0603]  92.33,84.45 270 top
R110  2.2k  [0603]  93.85,84.45 270 top
R111  27  [0603]  123.82,92.71 0 top
R112  27  [0603]  123.82,94.18 0 top
R113  1k  [0603]  133.99,92.71 0 top
R114  1k  [0603]  142.24,86.87 0 top
R115  10k  [0603]  137.29,92.71 180 top
R116  2.0k  [0603]  137.29,85.22 180 top
R117  1k  [0603]  133.99,83.69 0 top
R118  10k  [0603]  137.29,83.69 0 top
R119  2.2k  [0603]  144.4,84.45 270 top
R120  2.2k  [0603]  145.92,84.45 270 top
S1  RESET  [TACTILE_SWITCH_SMD_RIGHT_ANGLE]  24.13,25.65 180 top
S2  [SWITCH_SPST_SMD_A]  24.13,18.29 270 top
S3  BOOTLOAD  [TACTILE_SWITCH_SMD_RIGHT_ANGLE]  24.13,10.92 0 top
S4  RESET  [TACTILE_SWITCH_SMD_RIGHT_ANGLE]  76.2,25.65 180 top
S5  [SWITCH_SPST_SMD_A]  76.2,18.29 270 top
S6  BOOTLOAD  [TACTILE_SWITCH_SMD_RIGHT_ANGLE]  76.2,10.92 0 top
S7  RESET  [TACTILE_SWITCH_SMD_RIGHT_ANGLE]  128.27,25.65 180 top
S8  [SWITCH_SPST_SMD_A]  128.27,18.29 270 top
S9  BOOTLOAD  [TACTILE_SWITCH_SMD_RIGHT_ANGLE]  128.27,10.92 0 top
S10  RESET  [TACTILE_SWITCH_SMD_RIGHT_ANGLE]  24.13,49.02 180 top
S11  [SWITCH_SPST_SMD_A]  24.13,41.66 270 top
S12  BOOTLOAD  [TACTILE_SWITCH_SMD_RIGHT_ANGLE]  24.13,34.29 0 top
S13  RESET  [TACTILE_SWITCH_SMD_RIGHT_ANGLE]  76.2,49.02 180 top
S14  [SWITCH_SPST_SMD_A]  76.2,41.66 270 top
S15  BOOTLOAD  [TACTILE_SWITCH_SMD_RIGHT_ANGLE]  76.2,34.29 0 top
S16  RESET  [TACTILE_SWITCH_SMD_RIGHT_ANGLE]  128.27,49.02 180 top
S17  [SWITCH_SPST_SMD_A]  128.27,41.66 270 top
S18  BOOTLOAD  [TACTILE_SWITCH_SMD_RIGHT_ANGLE]  128.27,34.29 0 top
S19  RESET  [TACTILE_SWITCH_SMD_RIGHT_ANGLE]  24.13,72.39 180 top
S20  [SWITCH_SPST_SMD_A]  24.13,65.02 270 top
S21  BOOTLOAD  [TACTILE_SWITCH_SMD_RIGHT_ANGLE]  24.13,57.66 0 top
S22  RESET  [TACTILE_SWITCH_SMD_RIGHT_ANGLE]  76.2,72.39 180 top
S23  [SWITCH_SPST_SMD_A]  76.2,65.02 270 top
S24  BOOTLOAD  [TACTILE_SWITCH_SMD_RIGHT_ANGLE]  76.2,57.66 0 top
S25  RESET  [TACTILE_SWITCH_SMD_RIGHT_ANGLE]  128.27,72.39 180 top
S26  [SWITCH_SPST_SMD_A]  128.27,65.02 270 top
S27  BOOTLOAD  [TACTILE_SWITCH_SMD_RIGHT_ANGLE]  128.27,57.66 0 top
S28  RESET  [TACTILE_SWITCH_SMD_RIGHT_ANGLE]  24.13,95.76 180 top
S29  [SWITCH_SPST_SMD_A]  24.13,88.39 270 top
S30  BOOTLOAD  [TACTILE_SWITCH_SMD_RIGHT_ANGLE]  24.13,81.03 0 top
S31  RESET  [TACTILE_SWITCH_SMD_RIGHT_ANGLE]  76.2,95.76 180 top
S32  [SWITCH_SPST_SMD_A]  76.2,88.39 270 top
S33  BOOTLOAD  [TACTILE_SWITCH_SMD_RIGHT_ANGLE]  76.2,81.03 0 top
S34  RESET  [TACTILE_SWITCH_SMD_RIGHT_ANGLE]  128.27,95.76 180 top
S35  [SWITCH_SPST_SMD_A]  128.27,88.39 270 top
S36  BOOTLOAD  [TACTILE_SWITCH_SMD_RIGHT_ANGLE]  128.27,81.03 0 top
U1  MDBT50Q  [MDBT50Q]  54.31,18.29 270 top
U2  MCP73831  [SOT23-5]  29.87,18.14 0 top
U3  3.3V  [SOT23-5]  38.1,20.83 270 top
U4  MDBT50Q  [MDBT50Q]  106.38,18.29 270 top
U5  MCP73831  [SOT23-5]  81.94,18.14 0 top
U6  3.3V  [SOT23-5]  90.17,20.83 270 top
U7  MDBT50Q  [MDBT50Q]  158.45,18.29 270 top
U8  MCP73831  [SOT23-5]  134.01,18.14 0 top
U9  3.3V  [SOT23-5]  142.24,20.83 270 top
U10  MDBT50Q  [MDBT50Q]  54.31,41.66 270 top
U11  MCP73831  [SOT23-5]  29.87,41.5 0 top
U12  3.3V  [SOT23-5]  38.1,44.2 270 top
U13  MDBT50Q  [MDBT50Q]  106.38,41.66 270 top
U14  MCP73831  [SOT23-5]  81.94,41.5 0 top
U15  3.3V  [SOT23-5]  90.17,44.2 270 top
U16  MDBT50Q  [MDBT50Q]  158.45,41.66 270 top
U17  MCP73831  [SOT23-5]  134.01,41.5 0 top
U18  3.3V  [SOT23-5]  142.24,44.2 270 top
U19  MDBT50Q  [MDBT50Q]  54.31,65.02 270 top
U20  MCP73831  [SOT23-5]  29.87,64.87 0 top
U21  3.3V  [SOT23-5]  38.1,67.56 270 top
U22  MDBT50Q  [MDBT50Q]  106.38,65.02 270 top
U23  MCP73831  [SOT23-5]  81.94,64.87 0 top
U24  3.3V  [SOT23-5]  90.17,67.56 270 top
U25  MDBT50Q  [MDBT50Q]  158.45,65.02 270 top
U26  MCP73831  [SOT23-5]  134.01,64.87 0 top
U27  3.3V  [SOT23-5]  142.24,67.56 270 top
U28  MDBT50Q  [MDBT50Q]  54.31,88.39 270 top
U29  MCP73831  [SOT23-5]  29.87,88.24 0 top
U30  3.3V  [SOT23-5]  38.1,90.93 270 top
U31  MDBT50Q  [MDBT50Q]  106.38,88.39 270 top
U32  MCP73831  [SOT23-5]  81.94,88.24 0 top
U33  3.3V  [SOT23-5]  90.17,90.93 270 top
U34  MDBT50Q  [MDBT50Q]  158.45,88.39 270 top
U35  MCP73831  [SOT23-5]  134.01,88.24 0 top
U36  3.3V  [SOT23-5]  142.24,90.93 270 top
U$1  [3V316]  35.08,24.43 0 top
U$2  [130]  22.58,13.28 0 top
U$3  [RST19]  32.59,24.05 0 top
U$4  [ON1]  26.67,12.45 90 top
U$5  [CHG26]  21.11,24.08 90 top
U$6  [PWR27]  17.98,17.83 90 top
U$7  [GND17]  29.92,24.43 0 top
U$8  [QWIIC#LOGO#JPG]  36.83,13.36 0 top
U$9  [20]  57.15,22.61 90 bottom
U$10  [31]  54.61,22.61 90 bottom
U$11  [292]  46.99,21.87 90 bottom
U$12  [313]  52.07,22.07 90 bottom
U$13  [3V30]  36.83,20.85 90 bottom
U$14  [285]  44.45,21.87 90 bottom
U$15  [521]  41.91,22.68 90 bottom
U$16  [421]  39.37,22.61 90 bottom
U$17  [HTTP###SFE#IO#T8200]  20.32,11.18 90 bottom
U$18  [#RST6]  34.29,21.23 90 bottom
U$19  [GND7]  31.75,20.55 90 bottom
U$20  [VIN8]  29.21,21.16 90 bottom
U$21  [1022]  57.15,11.66 90 bottom
U$22  [916]  54.61,11.66 90 bottom
U$23  [2111]  46.99,11.48 90 bottom
U$24  [1912]  41.91,11.66 90 bottom
U$25  [1713]  29.21,11.66 90 bottom
U$26  [1522]  31.75,11.61 90 bottom
U$27  [VIN19]  27.53,24.43 0 top
U$28  [70]  39.75,18.29 0 top
U$29  [NRF52840_MINI_BREAKOUT0]  46.08,15.49 0 bottom
U$30  [GND6]  38.96,8.13 0 bottom
U$31  [27]  55.75,24.33 0 top
U$32  [36]  53.21,24.33 0 top
U$33  [SWD0]  57.28,16.38 90 bottom
U$34  [315]  50.44,24.33 0 top
U$35  [300]  49.53,21.84 90 bottom
U$36  [301]  47.88,24.33 0 top
U$37  [293]  45.36,24.33 0 top
U$38  [108]  55.63,12.24 0 top
U$39  [51]  40.28,24.33 0 top
U$40  [40]  38.23,24.33 0 top
U$41  [97]  53.42,12.24 0 top
U$42  [236]  50.42,12.24 0 top
U$43  [200]  44.45,11.61 90 bottom
U$44  [225]  47.85,12.24 0 top
U$45  [221]  49.53,11.48 90 bottom
U$46  [214]  45.47,12.24 0 top
U$47  [203]  42.8,12.24 0 top
U$48  [192]  40.44,12.24 0 top
U$49  [151]  30.12,12.24 0 top
U$50  [170]  27.72,12.24 0 top
U$51  [RST1]  21.79,23.29 0 top
U$52  [ANALOG2]  44.12,22.25 0 bottom
U$53  [232]  52.07,11.48 90 bottom
U$54  [SCL#114]  39.75,11.94 0 bottom
U$55  [SDA#83]  39.67,10.24 0 bottom
U$56  [IO2]  53.98,18.41 90 bottom
U$57  [CLK1]  53.98,15.24 90 bottom
U$58  [OFF2]  26.67,19.3 90 top
U$59  [CHG26]  73.18,24.08 90 top
U$60  [PWR27]  70.05,17.83 90 top
U$61  [GND6]  91.03,8.13 0 bottom
U$62  [20]  109.22,22.61 90 bottom
U$63  [31]  106.68,22.61 90 bottom
U$64  [292]  99.06,21.87 90 bottom
U$65  [313]  104.14,22.07 90 bottom
U$66  [285]  96.52,21.87 90 bottom
U$67  [521]  93.98,22.68 90 bottom
U$68  [421]  91.44,22.61 90 bottom
U$69  [#RST6]  86.36,21.23 90 bottom
U$70  [GND7]  83.82,20.55 90 bottom
U$71  [VIN8]  81.28,21.16 90 bottom
U$72  [1022]  109.22,11.66 90 bottom
U$73  [916]  106.68,11.66 90 bottom
U$74  [2111]  99.06,11.48 90 bottom
U$75  [1912]  93.98,11.66 90 bottom
U$76  [1713]  81.28,11.66 90 bottom
U$77  [1522]  83.82,11.61 90 bottom
U$78  [200]  96.52,11.61 90 bottom
U$79  [221]  101.6,11.48 90 bottom
U$80  [232]  104.14,11.48 90 bottom
U$81  [SCL#114]  91.82,11.94 0 bottom
U$82  [SDA#83]  91.74,10.24 0 bottom
U$83  [SWD0]  109.35,16.38 90 bottom
U$84  [IO2]  106.04,18.41 90 bottom
U$85  [CLK1]  106.04,15.24 90 bottom
U$86  [NRF52840_MINI_BREAKOUT0]  98.15,15.49 0 bottom
U$87  [QWIIC#LOGO#JPG]  88.9,13.36 0 top
U$88  [70]  91.82,18.29 0 top
U$89  [GND17]  81.99,24.43 0 top
U$90  [VIN19]  79.6,24.43 0 top
U$91  [RST19]  84.66,24.05 0 top
U$92  [3V316]  87.15,24.43 0 top
U$93  [27]  107.82,24.33 0 top
U$94  [36]  105.28,24.33 0 top
U$95  [315]  102.51,24.33 0 top
U$96  [293]  97.43,24.33 0 top
U$97  [51]  92.35,24.33 0 top
U$98  [40]  90.3,24.33 0 top
U$99  [108]  107.7,12.24 0 top
U$100  [97]  105.49,12.24 0 top
U$101  [236]  102.49,12.24 0 top
U$102  [225]  99.92,12.24 0 top
U$103  [214]  97.54,12.24 0 top
U$104  [203]  94.87,12.24 0 top
U$105  [192]  92.51,12.24 0 top
U$106  [151]  82.19,12.24 0 top
U$107  [170]  79.79,12.24 0 top
U$108  [RST1]  73.86,23.29 0 top
U$109  [130]  74.65,13.28 0 top
U$110  [300]  101.6,21.84 90 bottom
U$111  [3V30]  88.9,20.85 90 bottom
U$112  [HTTP###SFE#IO#T8200]  72.39,11.18 90 bottom
U$113  [ON1]  78.74,12.45 90 top
U$114  [OFF2]  78.74,19.3 90 top
U$115  [ANALOG2]  96.19,22.25 0 bottom
U$116  [301]  99.95,24.33 0 top
U$117  [CHG26]  125.25,24.08 90 top
U$118  [PWR27]  122.12,17.83 90 top
U$119  [GND6]  143.1,8.13 0 bottom
U$120  [20]  161.29,22.61 90 bottom
U$121  [31]  158.75,22.61 90 bottom
U$122  [292]  151.13,21.87 90 bottom
U$123  [313]  156.21,22.07 90 bottom
U$124  [285]  148.59,21.87 90 bottom
U$125  [521]  146.05,22.68 90 bottom
U$126  [421]  143.51,22.61 90 bottom
U$127  [#RST6]  138.43,21.23 90 bottom
U$128  [GND7]  135.89,20.55 90 bottom
U$129  [VIN8]  133.35,21.16 90 bottom
U$130  [1022]  161.29,11.66 90 bottom
U$131  [916]  158.75,11.66 90 bottom
U$132  [2111]  151.13,11.48 90 bottom
U$133  [1912]  146.05,11.66 90 bottom
U$134  [1713]  133.35,11.66 90 bottom
U$135  [1522]  135.89,11.61 90 bottom
U$136  [200]  148.59,11.61 90 bottom
U$137  [221]  153.67,11.48 90 bottom
U$138  [232]  156.21,11.48 90 bottom
U$139  [SCL#114]  143.89,11.94 0 bottom
U$140  [SDA#83]  143.81,10.24 0 bottom
U$141  [SWD0]  161.42,16.38 90 bottom
U$142  [IO2]  158.12,18.41 90 bottom
U$143  [CLK1]  158.12,15.24 90 bottom
U$144  [NRF52840_MINI_BREAKOUT0]  150.22,15.49 0 bottom
U$145  [QWIIC#LOGO#JPG]  140.97,13.36 0 top
U$146  [70]  143.89,18.29 0 top
U$147  [GND17]  134.06,24.43 0 top
U$148  [VIN19]  131.67,24.43 0 top
U$149  [RST19]  136.73,24.05 0 top
U$150  [3V316]  139.22,24.43 0 top
U$151  [27]  159.89,24.33 0 top
U$152  [36]  157.35,24.33 0 top
U$153  [315]  154.58,24.33 0 top
U$154  [293]  149.5,24.33 0 top
U$155  [51]  144.42,24.33 0 top
U$156  [40]  142.37,24.33 0 top
U$157  [108]  159.77,12.24 0 top
U$158  [97]  157.56,12.24 0 top
U$159  [236]  154.56,12.24 0 top
U$160  [225]  151.99,12.24 0 top
U$161  [214]  149.61,12.24 0 top
U$162  [203]  146.94,12.24 0 top
U$163  [192]  144.58,12.24 0 top
U$164  [151]  134.26,12.24 0 top
U$165  [170]  131.86,12.24 0 top
U$166  [RST1]  125.93,23.29 0 top
U$167  [130]  126.72,13.28 0 top
U$168  [300]  153.67,21.84 90 bottom
U$169  [3V30]  140.97,20.85 90 bottom
U$170  [HTTP###SFE#IO#T8200]  124.46,11.18 90 bottom
U$171  [ON1]  130.81,12.45 90 top
U$172  [OFF2]  130.81,19.3 90 top
U$173  [ANALOG2]  148.26,22.25 0 bottom
U$174  [301]  152.02,24.33 0 top
U$175  [CHG26]  21.11,47.45 90 top
U$176  [PWR27]  17.98,41.2 90 top
U$177  [GND6]  38.96,31.5 0 bottom
U$178  [20]  57.15,45.97 90 bottom
U$179  [31]  54.61,45.97 90 bottom
U$180  [292]  46.99,45.24 90 bottom
U$181  [313]  52.07,45.44 90 bottom
U$182  [285]  44.45,45.24 90 bottom
U$183  [521]  41.91,46.05 90 bottom
U$184  [421]  39.37,45.97 90 bottom
U$185  [#RST6]  34.29,44.6 90 bottom
U$186  [GND7]  31.75,43.92 90 bottom
U$187  [VIN8]  29.21,44.53 90 bottom
U$188  [1022]  57.15,35.03 90 bottom
U$189  [916]  54.61,35.03 90 bottom
U$190  [2111]  46.99,34.85 90 bottom
U$191  [1912]  41.91,35.03 90 bottom
U$192  [1713]  29.21,35.03 90 bottom
U$193  [1522]  31.75,34.98 90 bottom
U$194  [200]  44.45,34.98 90 bottom
U$195  [221]  49.53,34.85 90 bottom
U$196  [232]  52.07,34.85 90 bottom
U$197  [SCL#114]  39.75,35.31 0 bottom
U$198  [SDA#83]  39.67,33.6 0 bottom
U$199  [SWD0]  57.28,39.75 90 bottom
U$200  [IO2]  53.98,41.78 90 bottom
U$201  [CLK1]  53.98,38.61 90 bottom
U$202  [NRF52840_MINI_BREAKOUT0]  46.08,38.86 0 bottom
U$203  [QWIIC#LOGO#JPG]  36.83,36.73 0 top
U$204  [70]  39.75,41.66 0 top
U$205  [GND17]  29.92,47.8 0 top
U$206  [VIN19]  27.53,47.8 0 top
U$207  [RST19]  32.59,47.42 0 top
U$208  [3V316]  35.08,47.8 0 top
U$209  [27]  55.75,47.7 0 top
U$210  [36]  53.21,47.7 0 top
U$211  [315]  50.44,47.7 0 top
U$212  [293]  45.36,47.7 0 top
U$213  [51]  40.28,47.7 0 top
U$214  [40]  38.23,47.7 0 top
U$215  [108]  55.63,35.61 0 top
U$216  [97]  53.42,35.61 0 top
U$217  [236]  50.42,35.61 0 top
U$218  [225]  47.85,35.61 0 top
U$219  [214]  45.47,35.61 0 top
U$220  [203]  42.8,35.61 0 top
U$221  [192]  40.44,35.61 0 top
U$222  [151]  30.12,35.61 0 top
U$223  [170]  27.72,35.61 0 top
U$224  [RST1]  21.79,46.66 0 top
U$225  [130]  22.58,36.65 0 top
U$226  [300]  49.53,45.21 90 bottom
U$227  [3V30]  36.83,44.22 90 bottom
U$228  [HTTP###SFE#IO#T8200]  20.32,34.54 90 bottom
U$229  [ON1]  26.67,35.81 90 top
U$230  [OFF2]  26.67,42.67 90 top
U$231  [ANALOG2]  44.12,45.62 0 bottom
U$232  [301]  47.88,47.7 0 top
U$233  [CHG26]  73.18,47.45 90 top
U$234  [PWR27]  70.05,41.2 90 top
U$235  [GND6]  91.03,31.5 0 bottom
U$236  [20]  109.22,45.97 90 bottom
U$237  [31]  106.68,45.97 90 bottom
U$238  [292]  99.06,45.24 90 bottom
U$239  [313]  104.14,45.44 90 bottom
U$240  [285]  96.52,45.24 90 bottom
U$241  [521]  93.98,46.05 90 bottom
U$242  [421]  91.44,45.97 90 bottom
U$243  [#RST6]  86.36,44.6 90 bottom
U$244  [GND7]  83.82,43.92 90 bottom
U$245  [VIN8]  81.28,44.53 90 bottom
U$246  [1022]  109.22,35.03 90 bottom
U$247  [916]  106.68,35.03 90 bottom
U$248  [2111]  99.06,34.85 90 bottom
U$249  [1912]  93.98,35.03 90 bottom
U$250  [1713]  81.28,35.03 90 bottom
U$251  [1522]  83.82,34.98 90 bottom
U$252  [200]  96.52,34.98 90 bottom
U$253  [221]  101.6,34.85 90 bottom
U$254  [232]  104.14,34.85 90 bottom
U$255  [SCL#114]  91.82,35.31 0 bottom
U$256  [SDA#83]  91.74,33.6 0 bottom
U$257  [SWD0]  109.35,39.75 90 bottom
U$258  [IO2]  106.04,41.78 90 bottom
U$259  [CLK1]  106.04,38.61 90 bottom
U$260  [NRF52840_MINI_BREAKOUT0]  98.15,38.86 0 bottom
U$261  [QWIIC#LOGO#JPG]  88.9,36.73 0 top
U$262  [70]  91.82,41.66 0 top
U$263  [GND17]  81.99,47.8 0 top
U$264  [VIN19]  79.6,47.8 0 top
U$265  [RST19]  84.66,47.42 0 top
U$266  [3V316]  87.15,47.8 0 top
U$267  [27]  107.82,47.7 0 top
U$268  [36]  105.28,47.7 0 top
U$269  [315]  102.51,47.7 0 top
U$270  [293]  97.43,47.7 0 top
U$271  [51]  92.35,47.7 0 top
U$272  [40]  90.3,47.7 0 top
U$273  [108]  107.7,35.61 0 top
U$274  [97]  105.49,35.61 0 top
U$275  [236]  102.49,35.61 0 top
U$276  [225]  99.92,35.61 0 top
U$277  [214]  97.54,35.61 0 top
U$278  [203]  94.87,35.61 0 top
U$279  [192]  92.51,35.61 0 top
U$280  [151]  82.19,35.61 0 top
U$281  [170]  79.79,35.61 0 top
U$282  [RST1]  73.86,46.66 0 top
U$283  [130]  74.65,36.65 0 top
U$284  [300]  101.6,45.21 90 bottom
U$285  [3V30]  88.9,44.22 90 bottom
U$286  [HTTP###SFE#IO#T8200]  72.39,34.54 90 bottom
U$287  [ON1]  78.74,35.81 90 top
U$288  [OFF2]  78.74,42.67 90 top
U$289  [ANALOG2]  96.19,45.62 0 bottom
U$290  [301]  99.95,47.7 0 top
U$291  [CHG26]  125.25,47.45 90 top
U$292  [PWR27]  122.12,41.2 90 top
U$293  [GND6]  143.1,31.5 0 bottom
U$294  [20]  161.29,45.97 90 bottom
U$295  [31]  158.75,45.97 90 bottom
U$296  [292]  151.13,45.24 90 bottom
U$297  [313]  156.21,45.44 90 bottom
U$298  [285]  148.59,45.24 90 bottom
U$299  [521]  146.05,46.05 90 bottom
U$300  [421]  143.51,45.97 90 bottom
U$301  [#RST6]  138.43,44.6 90 bottom
U$302  [GND7]  135.89,43.92 90 bottom
U$303  [VIN8]  133.35,44.53 90 bottom
U$304  [1022]  161.29,35.03 90 bottom
U$305  [916]  158.75,35.03 90 bottom
U$306  [2111]  151.13,34.85 90 bottom
U$307  [1912]  146.05,35.03 90 bottom
U$308  [1713]  133.35,35.03 90 bottom
U$309  [1522]  135.89,34.98 90 bottom
U$310  [200]  148.59,34.98 90 bottom
U$311  [221]  153.67,34.85 90 bottom
U$312  [232]  156.21,34.85 90 bottom
U$313  [SCL#114]  143.89,35.31 0 bottom
U$314  [SDA#83]  143.81,33.6 0 bottom
U$315  [SWD0]  161.42,39.75 90 bottom
U$316  [IO2]  158.12,41.78 90 bottom
U$317  [CLK1]  158.12,38.61 90 bottom
U$318  [NRF52840_MINI_BREAKOUT0]  150.22,38.86 0 bottom
U$319  [QWIIC#LOGO#JPG]  140.97,36.73 0 top
U$320  [70]  143.89,41.66 0 top
U$321  [GND17]  134.06,47.8 0 top
U$322  [VIN19]  131.67,47.8 0 top
U$323  [RST19]  136.73,47.42 0 top
U$324  [3V316]  139.22,47.8 0 top
U$325  [27]  159.89,47.7 0 top
U$326  [36]  157.35,47.7 0 top
U$327  [315]  154.58,47.7 0 top
U$328  [293]  149.5,47.7 0 top
U$329  [51]  144.42,47.7 0 top
U$330  [40]  142.37,47.7 0 top
U$331  [108]  159.77,35.61 0 top
U$332  [97]  157.56,35.61 0 top
U$333  [236]  154.56,35.61 0 top
U$334  [225]  151.99,35.61 0 top
U$335  [214]  149.61,35.61 0 top
U$336  [203]  146.94,35.61 0 top
U$337  [192]  144.58,35.61 0 top
U$338  [151]  134.26,35.61 0 top
U$339  [170]  131.86,35.61 0 top
U$340  [RST1]  125.93,46.66 0 top
U$341  [130]  126.72,36.65 0 top
U$342  [300]  153.67,45.21 90 bottom
U$343  [3V30]  140.97,44.22 90 bottom
U$344  [HTTP###SFE#IO#T8200]  124.46,34.54 90 bottom
U$345  [ON1]  130.81,35.81 90 top
U$346  [OFF2]  130.81,42.67 90 top
U$347  [ANALOG2]  148.26,45.62 0 bottom
U$348  [301]  152.02,47.7 0 top
U$349  [CHG26]  21.11,70.82 90 top
U$350  [PWR27]  17.98,64.57 90 top
U$351  [GND6]  38.96,54.86 0 bottom
U$352  [20]  57.15,69.34 90 bottom
U$353  [31]  54.61,69.34 90 bottom
U$354  [292]  46.99,68.61 90 bottom
U$355  [313]  52.07,68.81 90 bottom
U$356  [285]  44.45,68.61 90 bottom
U$357  [521]  41.91,69.42 90 bottom
U$358  [421]  39.37,69.34 90 bottom
U$359  [#RST6]  34.29,67.97 90 bottom
U$360  [GND7]  31.75,67.28 90 bottom
U$361  [VIN8]  29.21,67.89 90 bottom
U$362  [1022]  57.15,58.39 90 bottom
U$363  [916]  54.61,58.39 90 bottom
U$364  [2111]  46.99,58.22 90 bottom
U$365  [1912]  41.91,58.39 90 bottom
U$366  [1713]  29.21,58.39 90 bottom
U$367  [1522]  31.75,58.34 90 bottom
U$368  [200]  44.45,58.34 90 bottom
U$369  [221]  49.53,58.22 90 bottom
U$370  [232]  52.07,58.22 90 bottom
U$371  [SCL#114]  39.75,58.67 0 bottom
U$372  [SDA#83]  39.67,56.97 0 bottom
U$373  [SWD0]  57.28,63.12 90 bottom
U$374  [IO2]  53.98,65.15 90 bottom
U$375  [CLK1]  53.98,61.98 90 bottom
U$376  [NRF52840_MINI_BREAKOUT0]  46.08,62.23 0 bottom
U$377  [QWIIC#LOGO#JPG]  36.83,60.09 0 top
U$378  [70]  39.75,65.02 0 top
U$379  [GND17]  29.92,71.17 0 top
U$380  [VIN19]  27.53,71.17 0 top
U$381  [RST19]  32.59,70.79 0 top
U$382  [3V316]  35.08,71.17 0 top
U$383  [27]  55.75,71.07 0 top
U$384  [36]  53.21,71.07 0 top
U$385  [315]  50.44,71.07 0 top
U$386  [293]  45.36,71.07 0 top
U$387  [51]  40.28,71.07 0 top
U$388  [40]  38.23,71.07 0 top
U$389  [108]  55.63,58.98 0 top
U$390  [97]  53.42,58.98 0 top
U$391  [236]  50.42,58.98 0 top
U$392  [225]  47.85,58.98 0 top
U$393  [214]  45.47,58.98 0 top
U$394  [203]  42.8,58.98 0 top
U$395  [192]  40.44,58.98 0 top
U$396  [151]  30.12,58.98 0 top
U$397  [170]  27.72,58.98 0 top
U$398  [RST1]  21.79,70.03 0 top
U$399  [130]  22.58,60.02 0 top
U$400  [300]  49.53,68.58 90 bottom
U$401  [3V30]  36.83,67.59 90 bottom
U$402  [HTTP###SFE#IO#T8200]  20.32,57.91 90 bottom
U$403  [ON1]  26.67,59.18 90 top
U$404  [OFF2]  26.67,66.04 90 top
U$405  [ANALOG2]  44.12,68.99 0 bottom
U$406  [301]  47.88,71.07 0 top
U$407  [CHG26]  73.18,70.82 90 top
U$408  [PWR27]  70.05,64.57 90 top
U$409  [GND6]  91.03,54.86 0 bottom
U$410  [20]  109.22,69.34 90 bottom
U$411  [31]  106.68,69.34 90 bottom
U$412  [292]  99.06,68.61 90 bottom
U$413  [313]  104.14,68.81 90 bottom
U$414  [285]  96.52,68.61 90 bottom
U$415  [521]  93.98,69.42 90 bottom
U$416  [421]  91.44,69.34 90 bottom
U$417  [#RST6]  86.36,67.97 90 bottom
U$418  [GND7]  83.82,67.28 90 bottom
U$419  [VIN8]  81.28,67.89 90 bottom
U$420  [1022]  109.22,58.39 90 bottom
U$421  [916]  106.68,58.39 90 bottom
U$422  [2111]  99.06,58.22 90 bottom
U$423  [1912]  93.98,58.39 90 bottom
U$424  [1713]  81.28,58.39 90 bottom
U$425  [1522]  83.82,58.34 90 bottom
U$426  [200]  96.52,58.34 90 bottom
U$427  [221]  101.6,58.22 90 bottom
U$428  [232]  104.14,58.22 90 bottom
U$429  [SCL#114]  91.82,58.67 0 bottom
U$430  [SDA#83]  91.74,56.97 0 bottom
U$431  [SWD0]  109.35,63.12 90 bottom
U$432  [IO2]  106.04,65.15 90 bottom
U$433  [CLK1]  106.04,61.98 90 bottom
U$434  [NRF52840_MINI_BREAKOUT0]  98.15,62.23 0 bottom
U$435  [QWIIC#LOGO#JPG]  88.9,60.09 0 top
U$436  [70]  91.82,65.02 0 top
U$437  [GND17]  81.99,71.17 0 top
U$438  [VIN19]  79.6,71.17 0 top
U$439  [RST19]  84.66,70.79 0 top
U$440  [3V316]  87.15,71.17 0 top
U$441  [27]  107.82,71.07 0 top
U$442  [36]  105.28,71.07 0 top
U$443  [315]  102.51,71.07 0 top
U$444  [293]  97.43,71.07 0 top
U$445  [51]  92.35,71.07 0 top
U$446  [40]  90.3,71.07 0 top
U$447  [108]  107.7,58.98 0 top
U$448  [97]  105.49,58.98 0 top
U$449  [236]  102.49,58.98 0 top
U$450  [225]  99.92,58.98 0 top
U$451  [214]  97.54,58.98 0 top
U$452  [203]  94.87,58.98 0 top
U$453  [192]  92.51,58.98 0 top
U$454  [151]  82.19,58.98 0 top
U$455  [170]  79.79,58.98 0 top
U$456  [RST1]  73.86,70.03 0 top
U$457  [130]  74.65,60.02 0 top
U$458  [300]  101.6,68.58 90 bottom
U$459  [3V30]  88.9,67.59 90 bottom
U$460  [HTTP###SFE#IO#T8200]  72.39,57.91 90 bottom
U$461  [ON1]  78.74,59.18 90 top
U$462  [OFF2]  78.74,66.04 90 top
U$463  [ANALOG2]  96.19,68.99 0 bottom
U$464  [301]  99.95,71.07 0 top
U$465  [CHG26]  125.25,70.82 90 top
U$466  [PWR27]  122.12,64.57 90 top
U$467  [GND6]  143.1,54.86 0 bottom
U$468  [20]  161.29,69.34 90 bottom
U$469  [31]  158.75,69.34 90 bottom
U$470  [292]  151.13,68.61 90 bottom
U$471  [313]  156.21,68.81 90 bottom
U$472  [285]  148.59,68.61 90 bottom
U$473  [521]  146.05,69.42 90 bottom
U$474  [421]  143.51,69.34 90 bottom
U$475  [#RST6]  138.43,67.97 90 bottom
U$476  [GND7]  135.89,67.28 90 bottom
U$477  [VIN8]  133.35,67.89 90 bottom
U$478  [1022]  161.29,58.39 90 bottom
U$479  [916]  158.75,58.39 90 bottom
U$480  [2111]  151.13,58.22 90 bottom
U$481  [1912]  146.05,58.39 90 bottom
U$482  [1713]  133.35,58.39 90 bottom
U$483  [1522]  135.89,58.34 90 bottom
U$484  [200]  148.59,58.34 90 bottom
U$485  [221]  153.67,58.22 90 bottom
U$486  [232]  156.21,58.22 90 bottom
U$487  [SCL#114]  143.89,58.67 0 bottom
U$488  [SDA#83]  143.81,56.97 0 bottom
U$489  [SWD0]  161.42,63.12 90 bottom
U$490  [IO2]  158.12,65.15 90 bottom
U$491  [CLK1]  158.12,61.98 90 bottom
U$492  [NRF52840_MINI_BREAKOUT0]  150.22,62.23 0 bottom
U$493  [QWIIC#LOGO#JPG]  140.97,60.09 0 top
U$494  [70]  143.89,65.02 0 top
U$495  [GND17]  134.06,71.17 0 top
U$496  [VIN19]  131.67,71.17 0 top
U$497  [RST19]  136.73,70.79 0 top
U$498  [3V316]  139.22,71.17 0 top
U$499  [27]  159.89,71.07 0 top
U$500  [36]  157.35,71.07 0 top
U$501  [315]  154.58,71.07 0 top
U$502  [293]  149.5,71.07 0 top
U$503  [51]  144.42,71.07 0 top
U$504  [40]  142.37,71.07 0 top
U$505  [108]  159.77,58.98 0 top
U$506  [97]  157.56,58.98 0 top
U$507  [236]  154.56,58.98 0 top
U$508  [225]  151.99,58.98 0 top
U$509  [214]  149.61,58.98 0 top
U$510  [203]  146.94,58.98 0 top
U$511  [192]  144.58,58.98 0 top
U$512  [151]  134.26,58.98 0 top
U$513  [170]  131.86,58.98 0 top
U$514  [RST1]  125.93,70.03 0 top
U$515  [130]  126.72,60.02 0 top
U$516  [300]  153.67,68.58 90 bottom
U$517  [3V30]  140.97,67.59 90 bottom
U$518  [HTTP###SFE#IO#T8200]  124.46,57.91 90 bottom
U$519  [ON1]  130.81,59.18 90 top
U$520  [OFF2]  130.81,66.04 90 top
U$521  [ANALOG2]  148.26,68.99 0 bottom
U$522  [301]  152.02,71.07 0 top
U$523  [CHG26]  21.11,94.18 90 top
U$524  [PWR27]  17.98,87.93 90 top
U$525  [GND6]  38.96,78.23 0 bottom
U$526  [20]  57.15,92.71 90 bottom
U$527  [31]  54.61,92.71 90 bottom
U$528  [292]  46.99,91.97 90 bottom
U$529  [313]  52.07,92.18 90 bottom
U$530  [285]  44.45,91.97 90 bottom
U$531  [521]  41.91,92.79 90 bottom
U$532  [421]  39.37,92.71 90 bottom
U$533  [#RST6]  34.29,91.34 90 bottom
U$534  [GND7]  31.75,90.65 90 bottom
U$535  [VIN8]  29.21,91.26 90 bottom
U$536  [1022]  57.15,81.76 90 bottom
U$537  [916]  54.61,81.76 90 bottom
U$538  [2111]  46.99,81.58 90 bottom